# Altium PCB PCB1.PcbDoc
Units mm, origin at the board's own origin, x right, y up, seen from the top; angles counter-clockwise.
Board outline 26.4 x 26.4 mm, 2 copper layers (Top Layer, Bottom Layer); 46 components, 23 nets, 128 pads, 55 vias.
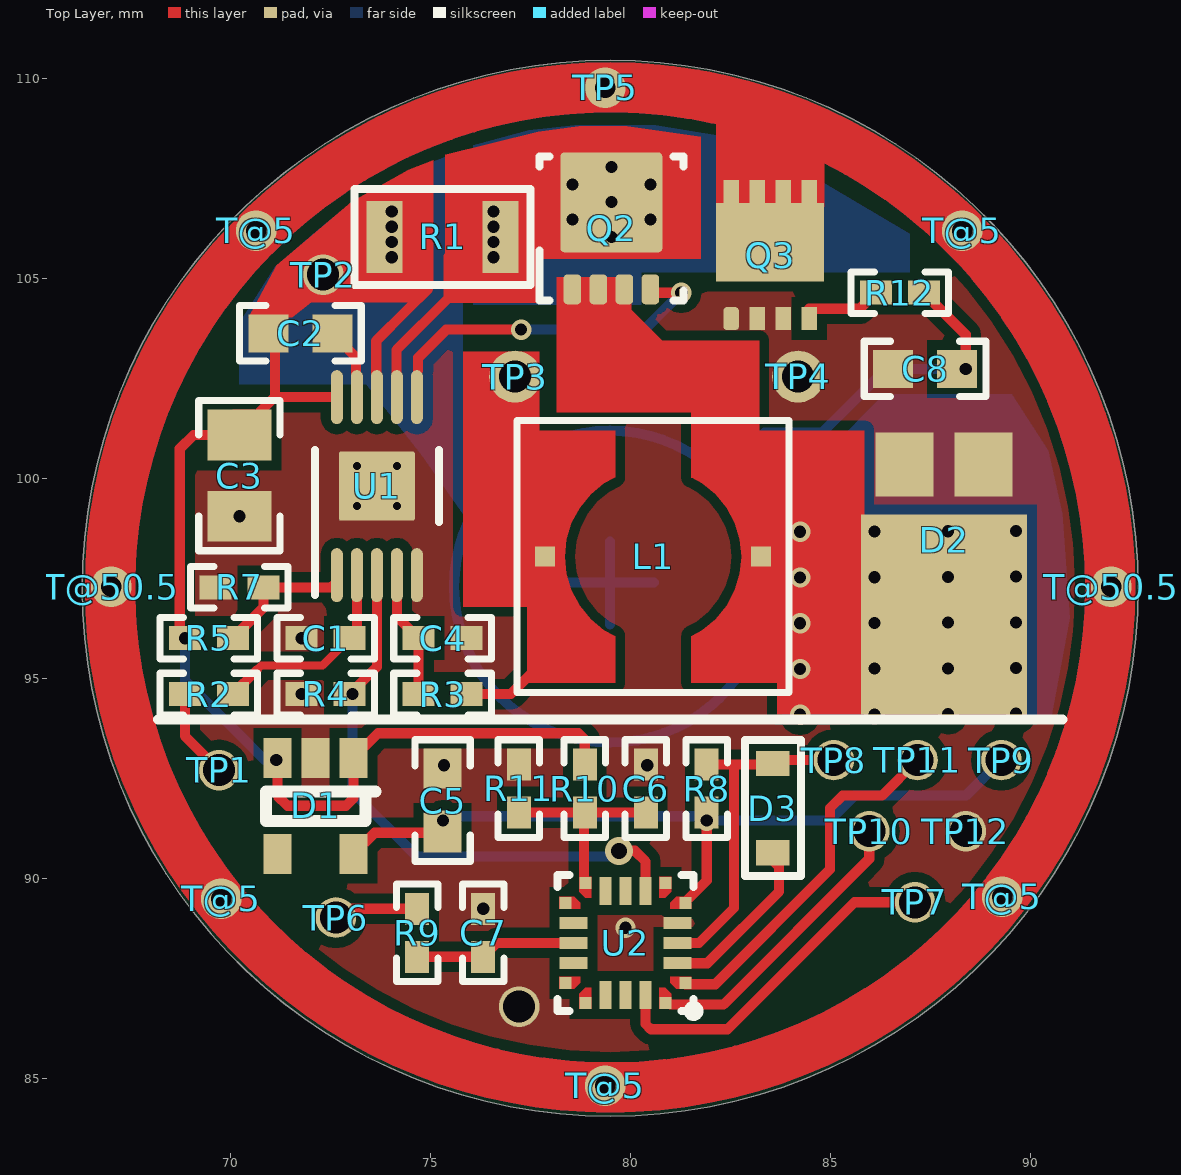
[diagram p0: Top Layer view]
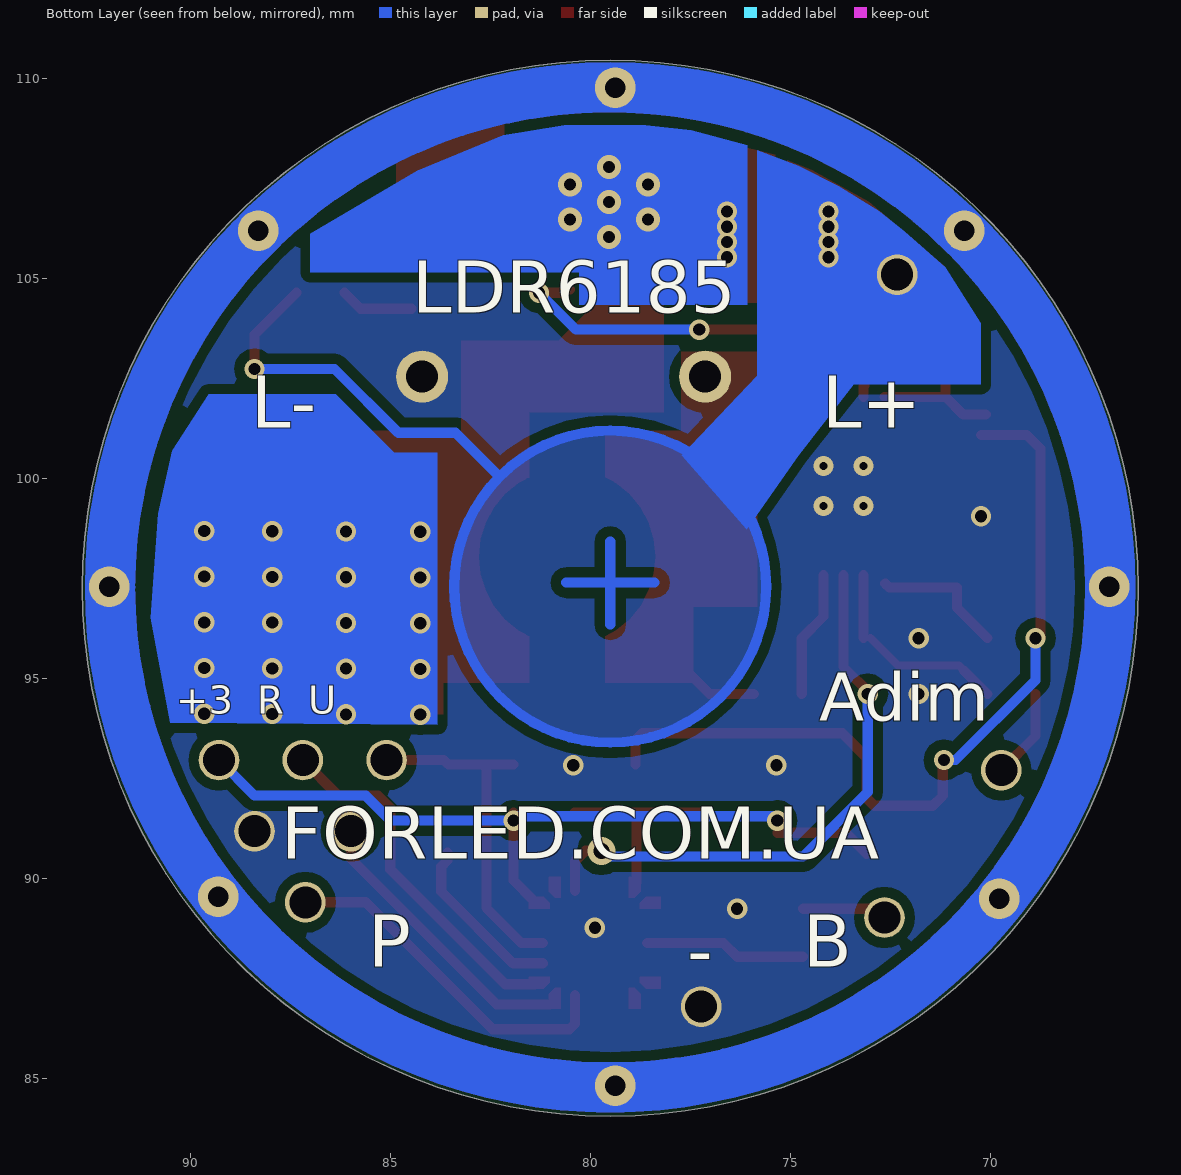
[diagram p1: Bottom Layer view, seen from below]

## Layer stack, top to bottom
Top Solder: solder mask 0.0102, Solder Resist, Dk 3.5
Top Layer: signal copper 0.0356
Dielectric 1: dielectric 0.32, FR-4, Dk 4.8
Bottom Layer: signal copper 0.0356
Bottom Solder: solder mask 0.0102, Solder Resist, Dk 3.5

## Board outline
79.501,84.062 cw(c79.501,97.262) 66.301,97.262 cw(c79.501,97.262) 79.501,110.462 cw(c79.501,97.262) 92.701,97.262 cw(c79.501,97.262)

## Design rules (kind name [scope] priority, off if disabled: settings)
Clearance [All] p1: gap=0.254
PlaneConnect [All] p1: planeconnectstyle=Direct reliefexpansion=0.508 reliefentries=4 reliefconductorwidth=0.254 reliefairgap=0.254
PolygonConnect [All] p1: connectstyle=Direct reliefconductorwidth=0.254 reliefentries=4 polygonreliefangle="90 Angle" airgapwidth=0.254
RoutingVias [All] p1: holewidth=0.711 width=1.27 viastyle="Through Hole" minholewidth=0.711 minwidth=1.27 maxholewidth=0.711 maxwidth=1.27
SolderMaskExpansion [All] p1: expansion=0.102
Width [All] p1: maxlimit=0.254 minlimit=0.254 preferedwidth=0.254
29 further rules are at their usual default settings.

## Classes and differential pairs
component class sch_lm3409: C1 C2 C3 C4 C5 C6 C7 C8 D1 D2 D3 L1 Q2 Q3 R1 R2 R3 R4 R5 R7 R8 R9 R10 R11 R12 TP1 TP2 TP3 TP4 TP5 TP6 TP7 TP8 TP9 TP10 TP11 TP12 U1 U2 U?

## Components (designator, comment, footprint, x,y, rotation, side; value= is the part's Value field where it differs from the comment)
C1 "C1005X7R1E104M050BB" 0402 72.39,96.012 r180 top
C2 "C1608X7R1C105K080AC" 0603#1 71.755,103.632 r90 top
C3 "C2012X7R1H105K125AB" 0805_HV 70.231,100.076 r270 top
C4 "C1005X7R1E104M050BB" 0402 75.311,96.012 r0 top
C5 "C1608X7R1C105K080AC" 0603#2 75.311,91.948 r90 top
C6 "C1005X7R1E104M050BB" 0402 80.391,92.252 r90 top
C7 "C1005X7R1E104M050BB" 0402 76.327,88.646 r90 top
C8 "C1608X7R1C105K080AC" 0603#2 87.376,102.743 r180 top
D1 "AP2125K-3.3TRG1" SOT23-5 72.136,91.821 r0 top
D2 "FSV1045V" TO-277 87.85,97.6 r90 top
D3 "JV" SOD323 83.566,91.76 r90 top
L1 "744053150" WE-TPC-LH 80.575,98.05 r180 top
Q2 "CSD25404Q3" DQG0008A 79.529,106.257 r90 top
Q3 "IRLHM620" "PQFN-8 3.3x3.3" 83.5,105.605 r0 top
R1 "PAD" "Resistor 1206" 75.311,106.045 r180 top
R2 "CRCW0402470RJNED" 0402 69.469,94.615 r0 top
R3 "CRCW0402470RJNED" 0402 75.311,94.615 r180 top
R4 "CRCW0402470RJNED" 0402 72.39,94.615 r0 top
R5 "CRCW0402470RJNED" 0402 69.469,96.012 r180 top
R7 "CRCW0402470RJNED" 0402 70.231,97.282 r0 top
R8 "CRCW0402470RJNED" 0402 81.915,92.252 r270 top
R9 "CRCW0402470RJNED" 0402 74.676,88.646 r90 top
R10 "CRCW0402470RJNED" 0402 78.867,92.252 r90 top
R11 "CRCW0402470RJNED" 0402 77.216,92.252 r270 top
R12 "CRCW0402470RJNED" 0402 86.741,104.648 r180 top
T@5 "*" "TP 0.8mm"#1 79.375,84.825 r90 top
T@5 "*" "TP 0.8mm"#1 70.65,106.2 r90 top
T@5 "*" "TP 0.8mm"#1 88.3,106.2 r90 top
T@5 "*" "TP 0.8mm"#1 89.3,89.55 r90 top
T@5 "*" "TP 0.8mm"#1 69.775,89.5 r90 top
T@50.5 "*" "TP 0.8mm"#1 92.025,97.3 r90 top
T@50.5 "*" "TP 0.8mm"#1 67.025,97.3 r90 top
TP1 "*" "TP 0.8mm"#2 69.723,92.71 r90 top
TP2 "*" "TP 0.8mm"#2 72.325,105.1 r90 top
TP3 "*" "TP 0.8mm"#3 77.125,102.55 r90 top
TP4 "*" "TP 0.8mm"#3 84.2,102.55 r90 top
TP5 "*" "TP 0.8mm"#1 79.375,109.775 r90 top
TP6 "*" "TP 0.8mm"#2 72.644,89.027 r270 top
TP7 "*" "TP 0.8mm"#2 87.122,89.408 r270 top
TP8 "*" "TP 0.8mm"#2 85.09,92.964 r180 top
TP9 "*" "TP 0.8mm"#2 89.281,92.964 r270 top
TP10 "*" "TP 0.8mm"#2 85.979,91.186 r180 top
TP11 "*" "TP 0.8mm"#2 87.185,92.964 r0 top
TP12 "*" "TP 0.8mm"#2 88.392,91.186 r0 top
U1 "LM3409MY/NOPB" MUC10A_N 73.668,99.814 r90 top
U2 "STM8L151" "UFQFPN20 3x3x0.5" 79.883,88.392 r180 top

## Footprints (in the part's own frame and the unit in brackets; to place one, negate y for a bottom-side part, rotate by r counter-clockwise, add the part's x,y. Pads: shape width x height; smd on the part's side, far side on the other; paste and mask are expansions set on the pad)
0402 [mm] "0402 from SM-752 data"
  rect 0.8x0.6 smd: 1(-0.6,0) 2(0.6,0)
  silkscreen extent -1.22,-0.52 1.22,0.52, body extent -0.55,-0.3 0.55,0.3, height 0.6
0603#1 [mm] "0603 from SM-752 data"
  rect 0.95x1 smd: 1(0,0.8) 2(0,-0.8)
  silkscreen extent -0.69,-1.52 0.69,1.52, body extent -0.47,-0.87 0.47,0.87, height 1
0603#2 [mm] "0603 from SM-752 data"
  rect 1x0.95 smd: 1(-0.8,0) 2(0.8,0)
  silkscreen extent -1.52,-0.69 1.52,0.69, body extent -0.87,-0.47 0.87,0.47, height 1
0805_HV [mil] "0805 with 30mil clearance between pads"
  rect 50x63 smd: 1(-40,0) 2(40,0)
  silkscreen extent -74,-40 74,40, body extent -43,-29 43,29, height 57
DQG0008A [mm] "SMD, 8-Leads, Body 3.3x3.3mm, Pitch 0.65mm"
  rrect45% 0.75x0.44 smd paste-0.05 mask-0.05: 1(-1.525,0.975) 2(-1.525,0.325) 3(-1.525,-0.325) 4(-1.525,-0.975) 5(1.525,-0.975) 6(1.525,-0.325) 7(1.525,0.325) 8(1.525,0.975)
  rrect50% 0.676x1.125 on Top Paste: 9(-0.212,0.662) 9(-0.212,-0.663) 9(0.664,-0.663) 9(0.664,0.662)
  rrect50% 1.775x2.45 on Top Solder: 9(0.327,0)
  rrect8% 2.5x2.55 smd paste-1.5 mask-1.5: 9(0.65,0)
  rrect50% 0.5x0.34 on Top Solder: 9(1.175,-0.975) 9(1.175,-0.325) 9(1.175,0.325) 9(1.175,0.975)
  silkscreen extent -1.8,-1.8 1.8,1.8, body extent -1.65,-1.65 1.65,1.65, height 1.1
MUC10A_N [mm] "TSSOP, 10-Leads, Body 3x3mm, Pitch 0.5mm, Exposed Pad, IPC Medium Density"
  rrect100% 1.35x0.3 smd: 1(-2.225,1) 2(-2.225,0.5) 3(-2.225,0) 4(-2.225,-0.5) 5(-2.225,-1) 6(2.225,-1) 7(2.225,-0.5) 8(2.225,0) 9(2.225,0.5) 10(2.225,1)
  rrect6% 1.73x1.9 smd: 11(0,0)
  silkscreen extent -2.73,-1.55 0.9,1.55, body extent -2.45,-1.5 2.45,1.5, height 0.96
"PQFN-8 3.3x3.3" [mm]
  rrect50% 0.39x0.58 smd: 1(-0.975,-1.605)
  rect 0.39x0.58 smd: 2(-0.325,-1.605) 3(0.325,-1.605) 4(0.975,-1.605) 5(-0.975,1.57) 5(-0.325,1.57) 5(0.325,1.57) 5(0.975,1.57)
  rect 2.7x1.96 smd paste-2: 5(0,0.3)
  body extent -1.65,-1.65 1.65,1.65, height 0.76
"Resistor 1206" [mm]
  rect 0.9x1.8 smd: 1(-1.45,0) 2(1.45,0)
  silkscreen extent -2.2,-1.2 2.2,1.2, body extent -1.6,-0.8 1.6,0.8, height 0.55
SOD323 [mm]
  rect 0.63x0.83 smd: 1(-1.115,0) 2(1.115,0)
  silkscreen extent -1.7,-0.7 1.7,0.7, body extent -1.35,-0.62 1.35,0.63, height 1.1
SOT23-5 [mm]
  rect 0.7x1 smd: 1(0.95,1.2) 2(0,1.2) 3(-0.95,1.2) 4(-0.95,-1.2) 5(0.95,-1.2)
  silkscreen extent -1.24,-0.38 1.5,0.36, body extent -1.45,-1.4 1.45,1.4, height 1.45
TO-277 [mm]
  rect 1.6x1.45 smd: 1(2.75,0.985) 2(2.75,-0.985)
  rect 5x4.15 smd: 3(-1,0)
  body extent -3.3,-2.37 3.35,2.38, height 1.2
"TP 0.8mm"#1 [mil]
  round 40 hole 20 mask+1: 1(0,0)
"TP 0.8mm"#2 [mil]
  round 40 hole 31.5 mask+1: 1(0,0)
"TP 0.8mm"#3 [mil]
  round 51.18 hole 31.5 mask+1: 1(0,0)
"UFQFPN20 3x3x0.5" [mm]
  rect 0.3x0.3 smd paste-0.3 mask-0.3: 1(-1.5,1) 5(-1.5,-1) 6(-1,-1.5) 10(1,-1.5) 11(1.5,-1) 15(1.5,1) 16(1,1.5) 20(-1,1.5)
  rect 0.7x0.3 smd: 2(-1.3,0.5) 3(-1.3,0) 4(-1.3,-0.5) 12(1.3,-0.5) 13(1.3,0) 14(1.3,0.5)
  rect 0.3x0.7 smd: 7(-0.5,-1.3) 8(0,-1.3) 9(0.5,-1.3) 17(0.5,1.3) 18(0,1.3) 19(-0.5,1.3)
  Top Layer region: 1.65,1.15 1.65,0.85 1.125,0.85 1.125,1 1.275,1.15
  Top Layer region: 1.15,1.65 0.85,1.65 0.85,1.125 1,1.125 1.15,1.275
  Top Layer region: 1.15,-1.65 0.85,-1.65 0.85,-1.125 1,-1.125 1.15,-1.275
  Top Layer region: 1.65,-1.15 1.65,-0.85 1.125,-0.85 1.125,-1 1.275,-1.15
  Top Layer region: -1.65,-1.15 -1.65,-0.85 -1.125,-0.85 -1.125,-1 -1.275,-1.15
  Top Layer region: -1.15,-1.65 -0.85,-1.65 -0.85,-1.125 -1,-1.125 -1.15,-1.275
  Top Layer region: -1.65,1.15 -1.65,0.85 -1.125,0.85 -1.125,1 -1.275,1.15
  Top Layer region: -1.15,1.65 -0.85,1.65 -0.85,1.125 -1,1.125 -1.15,1.275
  silkscreen extent -1.83,-1.7 1.7,1.82, body extent -1.5,-1.5 1.5,1.5, height 0.55
WE-TPC-LH [mm] "Wurth Elektronik recommended land pattern, 2009-01-15"
  rect 0.5x0.5 smd: 1(-2.7,0) 2(2.7,0)
  Top Layer region: -0.95,3.15 -0.95,3.15 -0.95,1.987 -1.228,1.838 -1.563,1.563 -1.838,1.228 -2.042,0.846 -2.168,0.431 -2.211,0 -2.168,-0.431 -2.042,-0.846 -1.838,-1.228 -1.563,-1.563 -1.228,-1.838 -0.95,-1.987 -0.95,-3.15 -3.15,-3.15 -3.15,-3.15 -3.15,3.15 -0.95,3.15
  Top Layer region: 0.95,3.15 0.95,3.15 0.95,1.987 1.228,1.838 1.563,1.563 1.838,1.228 2.042,0.846 2.168,0.431 2.211,0 2.168,-0.431 2.042,-0.846 1.838,-1.228 1.563,-1.563 1.228,-1.838 0.95,-1.987 0.95,-3.15 3.15,-3.15 3.15,-3.15 3.15,3.15 0.95,3.15
  silkscreen extent -3.4,-3.4 3.4,3.4, body extent -3.05,-3.05 3.05,3.05, height 3

## Part data
C1 C4 C6 C7: "CAP, CERM, 0.1 µF, 25 V, +/- 20%, X7R, 0402"
C2 C5 C8: "CAP, CERM, 1 µF, 16 V, +/- 10%, X7R, 0603"
C3: "CAP, CERM, 1 µF, 50 V, +/- 10%, X7R, 0805"
D1: library part AP2125K-2.8TRG1
D2: library part CMP-03102-1
D3: library part CMP-00083-4, "BAT54HT1G"
L1: "Inductor, Shielded Drum Core, Ferrite, 15 µH, 1.15 A, 0.07 ohm, SMD"
Q2: "MOSFET, P-CH, -20 V, -60 A, DQG0008A (VSON-CLIP-8)"
Q3: library part IRLHM620PbF, "IRLHM620PbF"
R1: library part Resistors_1
R2 R3 R4 R5 R7 R8 R9 R10 R11 R12: "RES, 470, 5%, 0.063 W, 0402"
T@5 T@5 T@5 T@5 T@5 T@50.5 T@50.5 TP1 TP2 TP3 TP4 TP5 TP6 TP7 TP8 TP9 TP10 TP11 TP12: library part CMP-00326-5, "TP 0.8mm"
U1: "PFET Buck Controller for High Power LED Drives, 10-pin eMSOP, Pb-Free"
U2: library part CMP-03101-1, "STM8L151F3U"

## Free pads (board coordinates)
  round 1.016 hole 0.8: 2(77.225,86.8)

## Via types
v1: diameter 0.508, hole 0.305, Top Layer to Bottom Layer, tented both sides, 43 vias
v2: diameter 0.6, hole 0.3, Top Layer to Bottom Layer, 7 vias
v3: diameter 0.5, hole 0.2, Top Layer to Bottom Layer, 4 vias
v4: diameter 0.7, hole 0.4, Top Layer to Bottom Layer, 1 vias

## Nets (pads, with @x,y where several pads share a name; then routed paths per layer and width w, separated by ;. In a path a pad name is that pad's centre, name@x,y a point inside that pad or via, vN(x,y) a via of type N, cw(c..) or ccw(c..) an arc to the next point about the centre after c; other vN are vias at no path point)
+3: C5.1 D1.5 R8.2 TP9.1 U2.5 | length 19.6
  Top Layer w0.254: D1.5 73.613,91.148 C5.1 ; U2.5@81.383,89.423 81.915,89.955 v1(81.915,91.45) R8.2
  Bottom Layer w0.254: v1(75.325,91.45) 75.435,91.56 81.805,91.56 v1(81.915,91.45) 84.986,91.45 85.611,92.075 88.392,92.075 TP9.1
ADC_ON: D3.1 U2.2 | length 4.3
  Top Layer w0.254: U2.2@81.183,87.884 81.932,87.884 83.725,89.677 83.725,90.298 83.566,90.458 D3.1
BAT-: Q3.5 T@5.1 T@50.5.1 TP5.1 | length 314.2
  Top Layer w0.254: 91.502,97.282 ccw(c79.502,97.282) 91.502,97.282 ; 92.502,97.282 ccw(c79.502,97.282) 92.502,97.282
  Bottom Layer w0.254: 91.502,97.282 ccw(c79.502,97.282) 91.502,97.282 ; 92.502,97.282 ccw(c79.502,97.282) 92.502,97.282
BAT_MEASURE: C6.1 R10.1 R11.2 U2.10 | length 4.9
  Top Layer w0.254: R11.2 R10.1 ; U2.10@78.852,89.892 78.844,89.9 78.844,91.629 R10.1 ; C6.1 R10.1
BTN_PROTECT: C7.1 R9.1 U2.13 | length 4.1
  Top Layer w0.254: R9.1 C7.1 76.673,88.392 U2.13
GND: C1.2 C3.2 C4.2 C5.2 C6.2 C7.2 C8.2 D1.2 D2.1 D2.2 pad.2 Q3.1 Q3.2 Q3.3 R4.1 R7.1 R11.1 TP4.1 TP12.1 U1.5 U1.11 U2.4
  other v1: 79.883,88.773 76.327,89.246 75.346,92.837 80.426,92.837 71.79,94.615 71.79,96.012 70.231,99.06
  other v3: 73.168,99.314 74.168,99.314 73.168,100.314 74.168,100.314
IADJ: C1.1 R2.2 U1.2 | length 5.1
  Top Layer w0.203: 70.658,95.204 70.779,95.325 72.306,95.325 72.546,95.565 72.546,95.568 C1.1
  Top Layer w0.254: R2.2 70.658,95.204 ; C1.1@73.168,96.012 U1.2
NetC2_2: C2.2 U1.9 | length 1.8
  Top Layer w0.254: C2.2 73.144,103.043 73.144,102.337 73.168,102.313 U1.9
NetC4_1: C4.1 R3.2 U1.4 | length 3.2
  Top Layer w0.254: U1.4 74.168,96.555 C4.1 R3.2
NetD2_3: D2.3 L1.1 Q2.1 Q2.2 Q2.3 | length 15
  Top Layer w0.254: Q2.1 Q2.2 Q2.3 79.854,104.042 82.71,101.186 82.71,99.49 83.375,98.825 83.375,98.025 83.991,97.409 87.532,97.409 D2.3@88.361,96.58
  other v1: 84.25,94.1 86.106,94.107 87.95,94.114 89.65,94.121 84.25,95.243 86.106,95.25 87.95,95.257 89.65,95.264 84.25,96.386 86.106,96.393 87.95,96.4 89.65,96.407 84.25,97.529 86.106,97.536 87.95,97.543 89.65,97.55 84.25,98.672 86.106,98.679 87.95,98.686 89.65,98.693
NetQ2_4: Q2.4 U1.6 | length 8.9
  Top Layer w0.254: U1.6 U1.6@74.668,102.481 ; U1.6@74.7,102.7 74.7,103.025 75.4,103.725 v1(77.275,103.725) ; Q2.4 80.547,104.775 80.674,104.648 v1(81.28,104.648)
  Bottom Layer w0.254: v1(77.275,103.725) 80.357,103.725 v1(81.28,104.648)
NetQ2_5: Q2.5 Q2.6 Q2.7 Q2.8 Q2.9@79.529,106.907 R1.1 U1.7 | length 7.8
  Top Layer w0.254: U1.7@74.16,102.547 74.16,103.22 75.458,104.518 75.458,105.55 R1.1@76.581,105.55 ; R1.1 78.667,106.045 Q2.9@79.529,106.907
  other v1: 76.581,105.537 76.581,105.918 76.581,106.299 76.581,106.68
  other v2: 79.529,106.045 78.554,106.483 80.504,106.483 79.529,106.921 78.554,107.359 80.504,107.359 79.529,107.797
NetQ3_4: Q3.4 R12.2 | length 1.8
  Top Layer w0.254: Q3.4@84.475,104.248 85.741,104.248 R12.2
NetR2_1: R2.1 TP1.1 | length 2.3
  Top Layer w0.254: R2.1 68.869,93.564 TP1.1
NetR9_2: R9.2 TP6.1 | length 2.1
  Top Layer w0.254: TP6.1 72.863,89.246 R9.2
PROG: TP7.1 U2.19 | length 8.8
  Top Layer w0.254: U2.19 80.383,86.368 80.518,86.233 82.436,86.233 85.611,89.408 TP7.1
PWM: R4.2 U1.3 U2.7 | length 14.6
  Top Layer w0.254: R4.2 73.668,95.293 U1.3 ; v4(79.722,90.697) 80.118,90.697 80.383,90.432 U2.7
  Bottom Layer w0.254: v1(73.06,94.615) 73.06,92.167 74.676,90.551 79.551,90.551 79.697,90.697 v4(79.722,90.697)
RESET: TP11.1 U2.1 | length 9
  Top Layer w0.254: U2.1@81.383,87.361 82.128,87.361 84.998,90.231 84.998,91.764 85.309,92.075 86.296,92.075 TP11.1
ROFF: L1.2 R3.1 TP3.1 | length 2.1
  Top Layer w0.254: R3.1 77.015,94.615 77.725,95.325
SWIM: TP10.1 U2.20 | length 7.3
  Top Layer w0.254: U2.20@80.914,86.892 80.969,86.892 81.008,86.853 82.338,86.853 85.979,90.494 TP10.1
UART: D3.2 R8.1 TP8.1 U2.3 | length 8.6
  Top Layer w0.254: U2.3 81.722,88.392 82.596,89.266 82.596,92.771 82.677,92.852 ; R8.1 82.677,92.852 ; TP8.1 83.654,92.964 D3.2 83.543,92.852 82.677,92.852
UVLO: R5.1 R7.2 U1.1 | length 3.4
  Top Layer w0.254: R5.1 70.831,96.774 R7.2 72.532,97.282 U1.1@72.625,97.375
VCC: C2.1 C3.1 C8.1 D1.1 D1.3 R1.2 R5.2 R10.2 R12.1 TP2.1 U1.8 U1.10 | length 75.2
  Top Layer w0.254: R5.2@68.742,96.012 68.742,100.746 69.088,101.092 C3.1 ; C3.1@70.104,101.6 70.673,101.6 71.112,102.039 U1.10@72.637,102.039 ; 71.12,102.108 71.12,104.14 72.644,105.664 73.48,105.664 R1.2 ; D1.3 71.186,92.075 71.181,92.075 71.435,91.821 72.898,91.821 73.086,92.009 D1.1 73.698,93.633 78.706,93.633 78.867,93.472 R10.2 ; U1.8@73.652,102.547 73.652,103.444 74.422,104.214 74.95,104.742 74.95,105.537 v1(74.041,105.537) ; R12.1 88.392,103.597 v1(88.392,102.743)
  Bottom Layer w0.254: v1(68.869,96.012) 68.869,94.961 70.866,92.964 v1(71.155,92.964) ; 72.644,105.664 72.644,104.14 76.674,100.11 ; 82.33,100.11 83.366,101.146 84.796,101.146 86.393,102.743 v1(88.392,102.743) ; 83.4,97.3 ccw(c79.5,97.3) 83.4,97.3
  other v1: 74.041,105.918 74.041,106.299 74.041,106.68
pads on no net: D1.4 Q2.9@78.554,107.432 Q2.9@78.867,106.045 Q2.9@78.867,106.921 Q2.9@79.204,107.432 Q2.9@79.529,106.585 Q2.9@79.854,107.432 Q2.9@80.192,106.045 Q2.9@80.192,106.921 Q2.9@80.504,107.432 U2.6 U2.8 U2.9 U2.11 U2.12 U2.14 U2.15 U2.16 U2.17 U2.18
copper on no net: | length 4.3
  Bottom Layer w0.254: 78.4,97.4 80.6,97.4 ; 79.5,96.35 79.5,98.425

## Polygon pours and split planes (outlines as drawn)
GND on Top Layer "GND_L01_P000" (solid, remove dead copper, pour order 0): 79.502,85.282 cw(c79.502,97.282) 67.502,97.282 cw(c79.502,97.282) 79.502,109.282 cw(c79.502,97.282) 91.502,97.282 cw(c79.502,97.282)
GND on Bottom Layer "GND_L02_P002" (solid, remove dead copper, pour order 2): 79.502,85.282 cw(c79.502,97.282) 67.502,97.282 cw(c79.502,97.282) 79.502,109.282 cw(c79.502,97.282) 91.502,97.282 cw(c79.502,97.282)
VCC on Bottom Layer "VCC_L02_P006" (solid, remove dead copper, pour order 6): 79.5,93.4 cw(c79.5,97.3) 75.6,97.3 cw(c79.5,97.3) 79.5,101.2 cw(c79.5,97.3) 83.4,97.3 cw(c79.5,97.3)

## Other copper
Top Layer:
  region net BAT-: 82.154,106.8 82.154,108.949 82.662,108.949 84.85,108.949 84.85,106.8
  region net VCC: 71.168,105.339 70.464,104.035 71.549,104.035 72.025,104.416 74.623,104.416 75.075,104.867 75.075,107.963 74.47,107.718 73.041,106.924 72.628,106.575
  region net NetQ2_5: 75.375,108.094 75.375,104.4 77.7,104.4 77.7,105.497 81.764,105.497 81.764,108.545 79.927,108.808 78.716,108.808 77.7,108.672
  region net ROFF: 77.724,103.175 75.825,103.175 75.825,96.8 77.724,96.8
  region net NetD2_3: 78.165,105.039 80.025,105.039 80.025,104.225 80.8,103.45 83.225,103.45 83.225,100.025 81.525,100.025 81.525,101.66 78.165,101.66
  region net NetD2_3: 83.675,101.2 83.675,94.107 89.9,94.107 89.9,99.06 86.36,99.06 85.85,99.06 85.85,99.316 85.85,101.2
  region net BAT-: 91.375,97.409 ccw(c91.502,97.409) 91.392,97.346 ccw(c91.502,97.282) 91.375,97.282 ccw(c91.502,97.282) 91.502,97.155 92.502,97.155 ccw(c92.502,97.282) 92.629,97.282 ccw(c79.502,97.282) 66.375,97.282 ccw(c66.502,97.282) 66.502,97.155 67.502,97.155 ccw(c67.502,97.282) 67.612,97.346 ccw(c67.502,97.409) 67.629,97.409 cw(c79.502,97.409)
  region net BAT-: 67.629,97.155 ccw(c67.502,97.155) 67.612,97.218 ccw(c67.502,97.282) 67.629,97.282 ccw(c67.502,97.282) 67.502,97.409 66.502,97.409 ccw(c66.502,97.282) 66.375,97.282 ccw(c79.502,97.282) 92.629,97.282 ccw(c92.502,97.282) 92.502,97.409 91.502,97.409 ccw(c91.502,97.282) 91.392,97.218 ccw(c91.502,97.155) 91.375,97.155 cw(c79.502,97.155)
Bottom Layer:
  region net NetD2_3: 90.5,93.9 90.986,96.526 90.8,99.125 90.45,100.7 89.542,102.108 87.63,102.108 86.358,102.108 84.9,100.65 83.82,100.65 83.82,93.853
  region net VCC: 75.819,108.204 75.819,104.775 75.819,102.57 77.714,100.59 76.092,98.741 74.803,100.572 73.406,102.362 70.231,102.362 70.231,103.886 71.12,105.283 72.136,106.172 72.771,106.68 73.787,107.315 74.803,107.823
  region net NetQ2_5: 76.073,108.331 76.073,104.35 80.275,104.35 80.275,105.156 80.772,105.156 86.995,105.156 86.995,106.12 84.328,107.696 82.169,108.585 80.645,108.839 78.613,108.839 77.47,108.712
  region net BAT-: 91.375,97.409 ccw(c91.502,97.409) 91.392,97.346 ccw(c91.502,97.282) 91.375,97.282 ccw(c91.502,97.282) 91.502,97.155 92.502,97.155 ccw(c92.502,97.282) 92.629,97.282 ccw(c79.502,97.282) 66.375,97.282 ccw(c66.502,97.282) 66.502,97.155 67.502,97.155 ccw(c67.502,97.282) 67.612,97.346 ccw(c67.502,97.409) 67.629,97.409 cw(c79.502,97.409)
  region net BAT-: 67.629,97.155 ccw(c67.502,97.155) 67.612,97.219 ccw(c67.502,97.282) 67.629,97.282 ccw(c67.502,97.282) 67.502,97.409 66.502,97.409 ccw(c66.502,97.282) 66.375,97.282 ccw(c79.502,97.282) 92.629,97.282 ccw(c92.502,97.282) 92.502,97.409 91.502,97.409 ccw(c91.502,97.282) 91.392,97.219 ccw(c91.502,97.155) 91.375,97.155 cw(c79.502,97.155)

## Silkscreen, mask and mechanical layers (free items; w line width, h text height)
Top Overlay:
  lines w0.254: 68.199,93.98 90.805,93.98
Bottom Overlay:
  text "LDR6185" at 84.45,104.15 h1.3
  text "L+" at 74.2,101.275 h1.3
  text "L-" at 88.475,101.275 h1.3
  text "+3  R  U" at 90.35,94.125 h0.7
  text "Adim" at 74.275,93.95 h1.2
  text "FORLED.COM.UA" at 87.725,90.5 h1.3
  text "B" at 74.675,87.8 h1.3
  text "P" at 85.55,87.8 h1.3
  text "-" at 77.575,87.575 h1.3
Top Solder:
  region: 83.6,99.562 83.6,96.588 85.15,96.588 85.15,99.562
  region: 76.65,99.612 76.65,96.8 78.2,96.8 78.2,99.612
  region: 67.63,97.146 ccw(c67.502,97.146) 67.613,97.21 ccw(c67.502,97.273) 67.63,97.273 ccw(c67.502,97.273) 67.502,97.401 66.502,97.401 ccw(c66.502,97.273) 66.375,97.273 ccw(c79.502,97.273) 92.63,97.273 ccw(c92.502,97.273) 92.502,97.401 91.502,97.401 ccw(c91.502,97.273) 91.392,97.21 ccw(c91.502,97.146) 91.375,97.146 cw(c79.502,97.146)
  region: 91.375,97.408 ccw(c91.502,97.408) 91.392,97.344 ccw(c91.502,97.281) 91.375,97.281 ccw(c91.502,97.281) 91.502,97.153 92.502,97.153 ccw(c92.502,97.281) 92.63,97.281 ccw(c79.502,97.281) 66.375,97.281 ccw(c66.502,97.281) 66.502,97.153 67.502,97.153 ccw(c67.502,97.281) 67.613,97.344 ccw(c67.502,97.408) 67.63,97.408 cw(c79.502,97.408)
Bottom Solder:
  region: 91.375,97.409 ccw(c91.502,97.409) 91.392,97.346 ccw(c91.502,97.282) 91.375,97.282 ccw(c91.502,97.282) 91.502,97.155 92.502,97.155 ccw(c92.502,97.282) 92.629,97.282 ccw(c79.502,97.282) 66.375,97.282 ccw(c66.502,97.282) 66.502,97.155 67.502,97.155 ccw(c67.502,97.282) 67.612,97.346 ccw(c67.502,97.409) 67.629,97.409 cw(c79.502,97.409)
  region: 67.629,97.155 ccw(c67.502,97.155) 67.612,97.218 ccw(c67.502,97.282) 67.629,97.282 ccw(c67.502,97.282) 67.502,97.409 66.502,97.409 ccw(c66.502,97.282) 66.375,97.282 ccw(c79.502,97.282) 92.629,97.282 ccw(c92.502,97.282) 92.502,97.409 91.502,97.409 ccw(c91.502,97.282) 91.392,97.218 ccw(c91.502,97.155) 91.375,97.155 cw(c79.502,97.155)
  region: 79.5,93.4 cw(c79.5,97.3) 75.6,97.3 cw(c79.5,97.3) 79.5,101.2 cw(c79.5,97.3) 83.4,97.3 cw(c79.5,97.3)
Mechanical 1:
  circle w0.254: c87.125,89.375 r0.285
  circle w0.254: c88.375,91.2 r0.285
  circle w0.254: c86.025,91.225 r0.285
  circle w0.254: c85.075,93 r0.285
  circle w0.254: c87.2,93 r0.285
  circle w0.254: c89.275,93 r0.285
  text "Uart" at 84.425,93.55 h0.8
  text "Rst" at 86.65,93.55 h0.8
  text "+3" at 89.125,93.525 h0.8
  text "Swim" at 85.3,91.775 h0.8
  text "Gnd" at 87.7,91.725 h0.8
  text "Prog" at 86.525,90.15 h0.8
Mechanical 3:
  circle w0.254: c79.501,97.262 r13.2